# Altium PCB OPAMP_TESTERh.PcbDoc (part 2 of 2)
Units mil, origin at the board's own origin, x right, y up, seen from the top; angles counter-clockwise.
Board outline 10340.03 x 6170.03 mil, 2 copper layers (Top Layer, Bottom Layer); 210 components, 0 nets, 1610 pads, 0 vias.
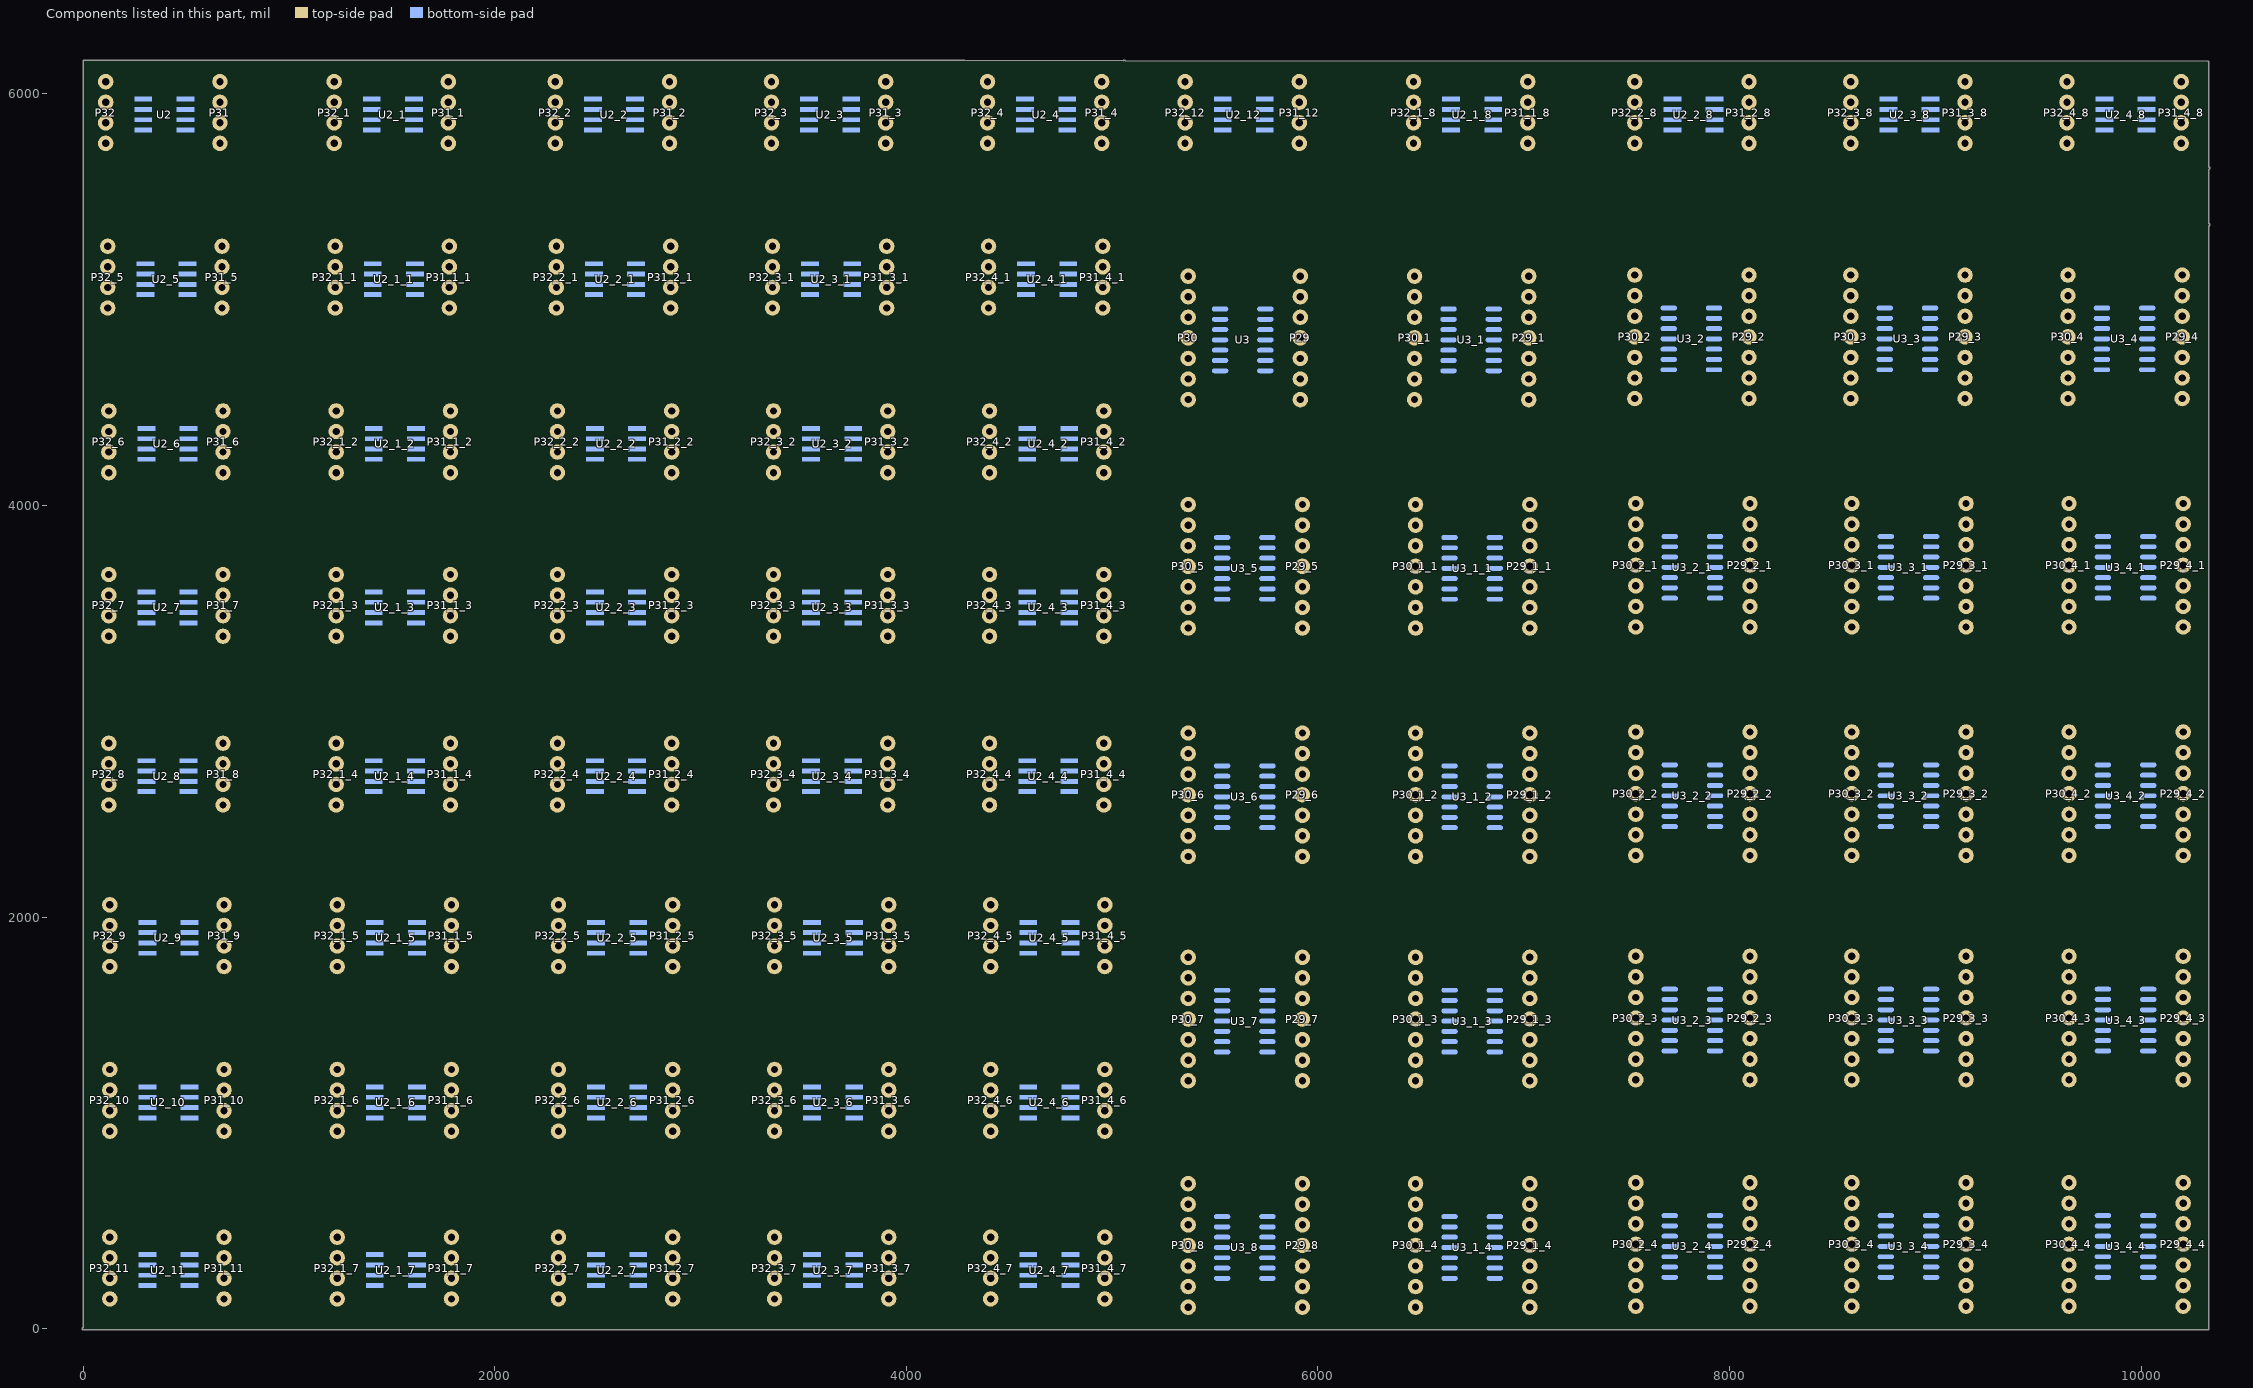
[diagram p2: the components of this part, seen from the top]

## Nets (pads, with @x,y where several pads share a name; then routed paths per layer and width w, separated by ;. In a path a pad name is that pad's centre, name@x,y a point inside that pad or via, vN(x,y) a via of type N, cw(c..) or ccw(c..) an arc to the next point about the centre after c; other vN are vias at no path point) (continued)
copper on no net: | length 143994.6
  Bottom Layer w30: 110,5760 175,5825 292.64,5825 ; 110,5860 122.18,5860 137.18,5875 292.64,5875 ; 110,5960 115.07,5960 150.07,5925 292.64,5925 ; 110,6060 118.61,6051.39 143.61,6051.39 220,5975 292.64,5975 ; 120,4960 185,5025 302.64,5025 ; 120,5060 132.18,5060 147.18,5075 302.64,5075 ; 120,5160 125.07,5160 160.07,5125 302.64,5125 ; 120,5260 128.61,5251.39 153.61,5251.39 230,5175 302.64,5175 ; 125,2545 190,2610 307.64,2610 ; 125,2645 137.18,2645 152.18,2660 307.64,2660 ; 125,2745 130.07,2745 165.07,2710 307.64,2710 ; 125,2845 133.61,2836.39 158.61,2836.39 235,2760 307.64,2760 ; 125,3365 190,3430 307.64,3430 ; 125,3465 137.18,3465 152.18,3480 307.64,3480 ; 125,3565 130.07,3565 165.07,3530 307.64,3530 ; 125,3665 133.61,3656.39 158.61,3656.39 235,3580 307.64,3580 ; 125,4160 190,4225 307.64,4225 ; 125,4260 137.18,4260 152.18,4275 307.64,4275 ; 125,4360 130.07,4360 165.07,4325 307.64,4325 ; 125,4460 133.61,4451.39 158.61,4451.39 235,4375 307.64,4375 ; 130,145 195,210 312.64,210 ; 130,245 142.18,245 157.18,260 312.64,260 ; 130,345 135.07,345 170.07,310 312.64,310 ; 130,445 138.61,436.39 163.61,436.39 240,360 312.64,360 ; 130,960 195,1025 312.64,1025 ; 130,1060 142.18,1060 157.18,1075 312.64,1075 ; 130,1160 135.07,1160 170.07,1125 312.64,1125 ; 130,1260 138.61,1251.39 163.61,1251.39 240,1175 312.64,1175 ; 130,1760 195,1825 312.64,1825 ; 130,1860 142.18,1860 157.18,1875 312.64,1875 ; 130,1960 135.07,1960 170.07,1925 312.64,1925 ; 130,2060 138.61,2051.39 163.61,2051.39 240,1975 312.64,1975 ; 497.36,5825 585,5825 641.39,5768.61 656.39,5768.61 665,5760 ; 497.36,5875 637.82,5875 652.82,5860 665,5860 ; 497.36,5925 617.82,5925 652.82,5960 665,5960 ; 497.36,5975 580,5975 665,6060 ; 507.36,5025 595,5025 651.39,4968.61 666.39,4968.61 675,4960 ; 507.36,5075 647.82,5075 662.82,5060 675,5060 ; 507.36,5125 627.82,5125 662.82,5160 675,5160 ; 507.36,5175 590,5175 675,5260 ; 512.36,2610 600,2610 656.39,2553.61 671.39,2553.61 680,2545 ; 512.36,2660 652.82,2660 667.82,2645 680,2645 ; 512.36,2710 632.82,2710 667.82,2745 680,2745 ; 512.36,2760 595,2760 680,2845 ; 512.36,3430 600,3430 656.39,3373.61 671.39,3373.61 680,3365 ; 512.36,3480 652.82,3480 667.82,3465 680,3465 ; 512.36,3530 632.82,3530 667.82,3565 680,3565 ; 512.36,3580 595,3580 680,3665 ; 512.36,4225 600,4225 656.39,4168.61 671.39,4168.61 680,4160 ; 512.36,4275 652.82,4275 667.82,4260 680,4260 ; 512.36,4325 632.82,4325 667.82,4360 680,4360 ; 512.36,4375 595,4375 680,4460 ; 517.36,210 605,210 661.39,153.61 676.39,153.61 685,145 ; 517.36,260 657.82,260 672.82,245 685,245 ; 517.36,310 637.82,310 672.82,345 685,345 ; 517.36,360 600,360 685,445 ; 517.36,1025 605,1025 661.39,968.61 676.39,968.61 685,960 ; 517.36,1075 657.82,1075 672.82,1060 685,1060 ; 517.36,1125 637.82,1125 672.82,1160 685,1160 ; 517.36,1175 600,1175 685,1260 ; 517.36,1825 605,1825 661.39,1768.61 676.39,1768.61 685,1760 ; 517.36,1875 657.82,1875 672.82,1860 685,1860 ; 517.36,1925 637.82,1925 672.82,1960 685,1960 ; 517.36,1975 600,1975 685,2060 ; 1220,5760 1285,5825 1402.64,5825 ; 1220,5860 1232.18,5860 1247.18,5875 1402.64,5875 ; 1220,5960 1225.07,5960 1260.07,5925 1402.64,5925 ; 1220,6060 1228.61,6051.39 1253.61,6051.39 1330,5975 1402.64,5975 ; 1225,4960 1290,5025 1407.64,5025 ; 1225,5060 1237.18,5060 1252.18,5075 1407.64,5075 ; 1225,5160 1230.07,5160 1265.07,5125 1407.64,5125 ; 1225,5260 1233.61,5251.39 1258.61,5251.39 1335,5175 1407.64,5175 ; 1230,2545 1295,2610 1412.64,2610 ; 1230,2645 1242.18,2645 1257.18,2660 1412.64,2660 ; 1230,2745 1235.07,2745 1270.07,2710 1412.64,2710 ; 1230,2845 1238.61,2836.39 1263.61,2836.39 1340,2760 1412.64,2760 ; 1230,3365 1295,3430 1412.64,3430 ; 1230,3465 1242.18,3465 1257.18,3480 1412.64,3480 ; 1230,3565 1235.07,3565 1270.07,3530 1412.64,3530 ; 1230,3665 1238.61,3656.39 1263.61,3656.39 1340,3580 1412.64,3580 ; 1230,4160 1295,4225 1412.64,4225 ; 1230,4260 1242.18,4260 1257.18,4275 1412.64,4275 ; 1230,4360 1235.07,4360 1270.07,4325 1412.64,4325 ; 1230,4460 1238.61,4451.39 1263.61,4451.39 1340,4375 1412.64,4375 ; 1235,145 1300,210 1417.64,210 ; 1235,245 1247.18,245 1262.18,260 1417.64,260 ; 1235,345 1240.07,345 1275.07,310 1417.64,310 ; 1235,445 1243.61,436.39 1268.61,436.39 1345,360 1417.64,360 ; 1235,960 1300,1025 1417.64,1025 ; 1235,1060 1247.18,1060 1262.18,1075 1417.64,1075 ; 1235,1160 1240.07,1160 1275.07,1125 1417.64,1125 ; 1235,1260 1243.61,1251.39 1268.61,1251.39 1345,1175 1417.64,1175 ; 1235,1760 1300,1825 1417.64,1825 ; 1235,1860 1247.18,1860 1262.18,1875 1417.64,1875 ; 1235,1960 1240.07,1960 1275.07,1925 1417.64,1925 ; 1235,2060 1243.61,2051.39 1268.61,2051.39 1345,1975 1417.64,1975 ; 1607.36,5825 1695,5825 1751.39,5768.61 1766.39,5768.61 1775,5760 ; 1607.36,5875 1747.82,5875 1762.82,5860 1775,5860 ; 1607.36,5925 1727.82,5925 1762.82,5960 1775,5960 ; 1607.36,5975 1690,5975 1775,6060 ; 1612.36,5025 1700,5025 1756.39,4968.61 1771.39,4968.61 1780,4960 ; 1612.36,5075 1752.82,5075 1767.82,5060 1780,5060 ; 1612.36,5125 1732.82,5125 1767.82,5160 1780,5160 ; 1612.36,5175 1695,5175 1780,5260 ; 1617.36,2610 1705,2610 1761.39,2553.61 1776.39,2553.61 1785,2545 ; 1617.36,2660 1757.82,2660 1772.82,2645 1785,2645 ; 1617.36,2710 1737.82,2710 1772.82,2745 1785,2745 ; 1617.36,2760 1700,2760 1785,2845 ; 1617.36,3430 1705,3430 1761.39,3373.61 1776.39,3373.61 1785,3365 ; 1617.36,3480 1757.82,3480 1772.82,3465 1785,3465 ; 1617.36,3530 1737.82,3530 1772.82,3565 1785,3565 ; 1617.36,3580 1700,3580 1785,3665 ; 1617.36,4225 1705,4225 1761.39,4168.61 1776.39,4168.61 1785,4160 ; 1617.36,4275 1757.82,4275 1772.82,4260 1785,4260 ; 1617.36,4325 1737.82,4325 1772.82,4360 1785,4360 ; 1617.36,4375 1700,4375 1785,4460 ; 1622.36,210 1710,210 1766.39,153.61 1781.39,153.61 1790,145 ; 1622.36,260 1762.82,260 1777.82,245 1790,245 ; 1622.36,310 1742.82,310 1777.82,345 1790,345 ; 1622.36,360 1705,360 1790,445 ; 1622.36,1025 1710,1025 1766.39,968.61 1781.39,968.61 1790,960 ; 1622.36,1075 1762.82,1075 1777.82,1060 1790,1060 ; 1622.36,1125 1742.82,1125 1777.82,1160 1790,1160 ; 1622.36,1175 1705,1175 1790,1260 ; 1622.36,1825 1710,1825 1766.39,1768.61 1781.39,1768.61 1790,1760 ; 1622.36,1875 1762.82,1875 1777.82,1860 1790,1860 ; 1622.36,1925 1742.82,1925 1777.82,1960 1790,1960 ; 1622.36,1975 1705,1975 1790,2060 ; 2295,5760 2360,5825 2477.64,5825 ; 2295,5860 2307.18,5860 2322.18,5875 2477.64,5875 ; 2295,5960 2300.07,5960 2335.07,5925 2477.64,5925 ; 2295,6060 2303.61,6051.39 2328.61,6051.39 2405,5975 2477.64,5975 ; 2300,4960 2365,5025 2482.64,5025 ; 2300,5060 2312.18,5060 2327.18,5075 2482.64,5075 ; 2300,5160 2305.07,5160 2340.07,5125 2482.64,5125 ; 2300,5260 2308.61,5251.39 2333.61,5251.39 2410,5175 2482.64,5175 ; 2305,2545 2370,2610 2487.64,2610 ; 2305,2645 2317.18,2645 2332.18,2660 2487.64,2660 ; 2305,2745 2310.07,2745 2345.07,2710 2487.64,2710 ; 2305,2845 2313.61,2836.39 2338.61,2836.39 2415,2760 2487.64,2760 ; 2305,3365 2370,3430 2487.64,3430 ; 2305,3465 2317.18,3465 2332.18,3480 2487.64,3480 ; 2305,3565 2310.07,3565 2345.07,3530 2487.64,3530 ; 2305,3665 2313.61,3656.39 2338.61,3656.39 2415,3580 2487.64,3580 ; 2305,4160 2370,4225 2487.64,4225 ; 2305,4260 2317.18,4260 2332.18,4275 2487.64,4275 ; 2305,4360 2310.07,4360 2345.07,4325 2487.64,4325 ; 2305,4460 2313.61,4451.39 2338.61,4451.39 2415,4375 2487.64,4375 ; 2310,145 2375,210 2492.64,210 ; 2310,245 2322.18,245 2337.18,260 2492.64,260 ; 2310,345 2315.07,345 2350.07,310 2492.64,310 ; 2310,445 2318.61,436.39 2343.61,436.39 2420,360 2492.64,360 ; 2310,960 2375,1025 2492.64,1025 ; 2310,1060 2322.18,1060 2337.18,1075 2492.64,1075 ; 2310,1160 2315.07,1160 2350.07,1125 2492.64,1125 ; 2310,1260 2318.61,1251.39 2343.61,1251.39 2420,1175 2492.64,1175 ; 2310,1760 2375,1825 2492.64,1825 ; 2310,1860 2322.18,1860 2337.18,1875 2492.64,1875 ; 2310,1960 2315.07,1960 2350.07,1925 2492.64,1925 ; 2310,2060 2318.61,2051.39 2343.61,2051.39 2420,1975 2492.64,1975 ; 2682.36,5825 2770,5825 2826.39,5768.61 2841.39,5768.61 2850,5760 ; 2682.36,5875 2822.82,5875 2837.82,5860 2850,5860 ; 2682.36,5925 2802.82,5925 2837.82,5960 2850,5960 ; 2682.36,5975 2765,5975 2850,6060 ; 2687.36,5025 2775,5025 2831.39,4968.61 2846.39,4968.61 2855,4960 ; 2687.36,5075 2827.82,5075 2842.82,5060 2855,5060 ; 2687.36,5125 2807.82,5125 2842.82,5160 2855,5160 ; 2687.36,5175 2770,5175 2855,5260 ; 2692.36,2610 2780,2610 2836.39,2553.61 2851.39,2553.61 2860,2545 ; 2692.36,2660 2832.82,2660 2847.82,2645 2860,2645 ; 2692.36,2710 2812.82,2710 2847.82,2745 2860,2745 ; 2692.36,2760 2775,2760 2860,2845 ; 2692.36,3430 2780,3430 2836.39,3373.61 2851.39,3373.61 2860,3365 ; 2692.36,3480 2832.82,3480 2847.82,3465 2860,3465 ; 2692.36,3530 2812.82,3530 2847.82,3565 2860,3565 ; 2692.36,3580 2775,3580 2860,3665 ; 2692.36,4225 2780,4225 2836.39,4168.61 2851.39,4168.61 2860,4160 ; 2692.36,4275 2832.82,4275 2847.82,4260 2860,4260 ; 2692.36,4325 2812.82,4325 2847.82,4360 2860,4360 ; 2692.36,4375 2775,4375 2860,4460 ; 2697.36,210 2785,210 2841.39,153.61 2856.39,153.61 2865,145 ; 2697.36,260 2837.82,260 2852.82,245 2865,245 ; 2697.36,310 2817.82,310 2852.82,345 2865,345 ; 2697.36,360 2780,360 2865,445 ; 2697.36,1025 2785,1025 2841.39,968.61 2856.39,968.61 2865,960 ; 2697.36,1075 2837.82,1075 2852.82,1060 2865,1060 ; 2697.36,1125 2817.82,1125 2852.82,1160 2865,1160 ; 2697.36,1175 2780,1175 2865,1260 ; 2697.36,1825 2785,1825 2841.39,1768.61 2856.39,1768.61 2865,1760 ; 2697.36,1875 2837.82,1875 2852.82,1860 2865,1860 ; 2697.36,1925 2817.82,1925 2852.82,1960 2865,1960 ; 2697.36,1975 2780,1975 2865,2060 ; 3345,5760 3410,5825 3527.64,5825 ; 3345,5860 3357.18,5860 3372.18,5875 3527.64,5875 ; 3345,5960 3350.07,5960 3385.07,5925 3527.64,5925 ; 3345,6060 3353.61,6051.39 3378.61,6051.39 3455,5975 3527.64,5975 ; 3350,4960 3415,5025 3532.64,5025 ; 3350,5060 3362.18,5060 3377.18,5075 3532.64,5075 ; 3350,5160 3355.07,5160 3390.07,5125 3532.64,5125 ; 3350,5260 3358.61,5251.39 3383.61,5251.39 3460,5175 3532.64,5175 ; 3355,2545 3420,2610 3537.64,2610 ; 3355,2645 3367.18,2645 3382.18,2660 3537.64,2660 ; 3355,2745 3360.07,2745 3395.07,2710 3537.64,2710 ; 3355,2845 3363.61,2836.39 3388.61,2836.39 3465,2760 3537.64,2760 ; 3355,3365 3420,3430 3537.64,3430 ; 3355,3465 3367.18,3465 3382.18,3480 3537.64,3480 ; 3355,3565 3360.07,3565 3395.07,3530 3537.64,3530 ; 3355,3665 3363.61,3656.39 3388.61,3656.39 3465,3580 3537.64,3580 ; 3355,4160 3420,4225 3537.64,4225 ; 3355,4260 3367.18,4260 3382.18,4275 3537.64,4275 ; 3355,4360 3360.07,4360 3395.07,4325 3537.64,4325 ; 3355,4460 3363.61,4451.39 3388.61,4451.39 3465,4375 3537.64,4375 ; 3360,145 3425,210 3542.64,210 ; 3360,245 3372.18,245 3387.18,260 3542.64,260 ; 3360,345 3365.07,345 3400.07,310 3542.64,310 ; 3360,445 3368.61,436.39 3393.61,436.39 3470,360 3542.64,360 ; 3360,960 3425,1025 3542.64,1025 ; 3360,1060 3372.18,1060 3387.18,1075 3542.64,1075 ; 3360,1160 3365.07,1160 3400.07,1125 3542.64,1125 ; 3360,1260 3368.61,1251.39 3393.61,1251.39 3470,1175 3542.64,1175 ; 3360,1760 3425,1825 3542.64,1825 ; 3360,1860 3372.18,1860 3387.18,1875 3542.64,1875 ; 3360,1960 3365.07,1960 3400.07,1925 3542.64,1925 ; 3360,2060 3368.61,2051.39 3393.61,2051.39 3470,1975 3542.64,1975 ; 3732.36,5825 3820,5825 3876.39,5768.61 3891.39,5768.61 3900,5760 ; 3732.36,5875 3872.82,5875 3887.82,5860 3900,5860 ; 3732.36,5925 3852.82,5925 3887.82,5960 3900,5960 ; 3732.36,5975 3815,5975 3900,6060 ; 3737.36,5025 3825,5025 3881.39,4968.61 3896.39,4968.61 3905,4960 ; 3737.36,5075 3877.82,5075 3892.82,5060 3905,5060 ; 3737.36,5125 3857.82,5125 3892.82,5160 3905,5160 ; 3737.36,5175 3820,5175 3905,5260 ; 3742.36,2610 3830,2610 3886.39,2553.61 3901.39,2553.61 3910,2545 ; 3742.36,2660 3882.82,2660 3897.82,2645 3910,2645 ; 3742.36,2710 3862.82,2710 3897.82,2745 3910,2745 ; 3742.36,2760 3825,2760 3910,2845 ; 3742.36,3430 3830,3430 3886.39,3373.61 3901.39,3373.61 3910,3365 ; 3742.36,3480 3882.82,3480 3897.82,3465 3910,3465 ; 3742.36,3530 3862.82,3530 3897.82,3565 3910,3565 ; 3742.36,3580 3825,3580 3910,3665 ; 3742.36,4225 3830,4225 3886.39,4168.61 3901.39,4168.61 3910,4160 ; 3742.36,4275 3882.82,4275 3897.82,4260 3910,4260 ; 3742.36,4325 3862.82,4325 3897.82,4360 3910,4360 ; 3742.36,4375 3825,4375 3910,4460 ; 3747.36,210 3835,210 3891.39,153.61 3906.39,153.61 3915,145 ; 3747.36,260 3887.82,260 3902.82,245 3915,245 ; 3747.36,310 3867.82,310 3902.82,345 3915,345 ; 3747.36,360 3830,360 3915,445 ; 3747.36,1025 3835,1025 3891.39,968.61 3906.39,968.61 3915,960 ; 3747.36,1075 3887.82,1075 3902.82,1060 3915,1060 ; 3747.36,1125 3867.82,1125 3902.82,1160 3915,1160 ; 3747.36,1175 3830,1175 3915,1260 ; 3747.36,1825 3835,1825 3891.39,1768.61 3906.39,1768.61 3915,1760 ; 3747.36,1875 3887.82,1875 3902.82,1860 3915,1860 ; 3747.36,1925 3867.82,1925 3902.82,1960 3915,1960 ; 3747.36,1975 3830,1975 3915,2060 ; 4395,5760 4460,5825 4577.64,5825 ; 4395,5860 4407.18,5860 4422.18,5875 4577.64,5875 ; 4395,5960 4400.07,5960 4435.07,5925 4577.64,5925 ; 4395,6060 4403.61,6051.39 4428.61,6051.39 4505,5975 4577.64,5975 ; 4400,4960 4465,5025 4582.64,5025 ; 4400,5060 4412.18,5060 4427.18,5075 4582.64,5075 ; 4400,5160 4405.07,5160 4440.07,5125 4582.64,5125 ; 4400,5260 4408.61,5251.39 4433.61,5251.39 4510,5175 4582.64,5175 ; 4405,2545 4470,2610 4587.64,2610 ; 4405,2645 4417.18,2645 4432.18,2660 4587.64,2660 ; 4405,2745 4410.07,2745 4445.07,2710 4587.64,2710 ; 4405,2845 4413.61,2836.39 4438.61,2836.39 4515,2760 4587.64,2760 ; 4405,3365 4470,3430 4587.64,3430 ; 4405,3465 4417.18,3465 4432.18,3480 4587.64,3480 ; 4405,3565 4410.07,3565 4445.07,3530 4587.64,3530 ; 4405,3665 4413.61,3656.39 4438.61,3656.39 4515,3580 4587.64,3580 ; 4405,4160 4470,4225 4587.64,4225 ; 4405,4260 4417.18,4260 4432.18,4275 4587.64,4275 ; 4405,4360 4410.07,4360 4445.07,4325 4587.64,4325 ; 4405,4460 4413.61,4451.39 4438.61,4451.39 4515,4375 4587.64,4375 ; 4410,145 4475,210 4592.64,210 ; 4410,245 4422.18,245 4437.18,260 4592.64,260 ; 4410,345 4415.07,345 4450.07,310 4592.64,310 ; 4410,445 4418.61,436.39 4443.61,436.39 4520,360 4592.64,360 ; 4410,960 4475,1025 4592.64,1025 ; 4410,1060 4422.18,1060 4437.18,1075 4592.64,1075 ; 4410,1160 4415.07,1160 4450.07,1125 4592.64,1125 ; 4410,1260 4418.61,1251.39 4443.61,1251.39 4520,1175 4592.64,1175 ; 4410,1760 4475,1825 4592.64,1825 ; 4410,1860 4422.18,1860 4437.18,1875 4592.64,1875 ; 4410,1960 4415.07,1960 4450.07,1925 4592.64,1925 ; 4410,2060 4418.61,2051.39 4443.61,2051.39 4520,1975 4592.64,1975 ; 4782.36,5825 4870,5825 4926.39,5768.61 4941.39,5768.61 4950,5760 ; 4782.36,5875 4922.82,5875 4937.82,5860 4950,5860 ; 4782.36,5925 4902.82,5925 4937.82,5960 4950,5960 ; 4782.36,5975 4865,5975 4950,6060 ; 4787.36,5025 4875,5025 4931.39,4968.61 4946.39,4968.61 4955,4960 ; 4787.36,5075 4927.82,5075 4942.82,5060 4955,5060 ; 4787.36,5125 4907.82,5125 4942.82,5160 4955,5160 ; 4787.36,5175 4870,5175 4955,5260 ; 4792.36,2610 4880,2610 4936.39,2553.61 4951.39,2553.61 4960,2545 ; 4792.36,2660 4932.82,2660 4947.82,2645 4960,2645 ; 4792.36,2710 4912.82,2710 4947.82,2745 4960,2745 ; 4792.36,2760 4875,2760 4960,2845 ; 4792.36,3430 4880,3430 4936.39,3373.61 4951.39,3373.61 4960,3365 ; 4792.36,3480 4932.82,3480 4947.82,3465 4960,3465 ; 4792.36,3530 4912.82,3530 4947.82,3565 4960,3565 ; 4792.36,3580 4875,3580 4960,3665 ; 4792.36,4225 4880,4225 4936.39,4168.61 4951.39,4168.61 4960,4160 ; 4792.36,4275 4932.82,4275 4947.82,4260 4960,4260 ; 4792.36,4325 4912.82,4325 4947.82,4360 4960,4360 ; 4792.36,4375 4875,4375 4960,4460 ; 4797.36,210 4885,210 4941.39,153.61 4956.39,153.61 4965,145 ; 4797.36,260 4937.82,260 4952.82,245 4965,245 ; 4797.36,310 4917.82,310 4952.82,345 4965,345 ; 4797.36,360 4880,360 4965,445 ; 4797.36,1025 4885,1025 4941.39,968.61 4956.39,968.61 4965,960 ; 4797.36,1075 4937.82,1075 4952.82,1060 4965,1060 ; 4797.36,1125 4917.82,1125 4952.82,1160 4965,1160 ; 4797.36,1175 4880,1175 4965,1260 ; 4797.36,1825 4885,1825 4941.39,1768.61 4956.39,1768.61 4965,1760 ; 4797.36,1875 4937.82,1875 4952.82,1860 4965,1860 ; 4797.36,1925 4917.82,1925 4952.82,1960 4965,1960 ; 4797.36,1975 4880,1975 4965,2060 ; 5355,5760 5420,5825 5537.64,5825 ; 5355,5860 5367.18,5860 5382.18,5875 5537.64,5875 ; 5355,5960 5360.07,5960 5395.07,5925 5537.64,5925 ; 5355,6060 5363.61,6051.39 5388.61,6051.39 5465,5975 5537.64,5975 ; 5360,4515 5363,4515 5503,4655 5525,4655 ; 5360,4615 5447,4702 5522,4702 5525,4705 ; 5360,4715 5372.18,4715 5412.18,4755 5525,4755 ; 5360,4815 5442.5,4815 5452.5,4805 5525,4805 ; 5360,4915 5362.67,4915 5422.67,4855 5525,4855 ; 5360,5015 5470.96,4904.04 5524.04,4904.04 ; 5360,5115 5445,5115 5525,5035 5525,4955 ; 5370,105 5373,105 5513,245 5535,245 ; 5370,205 5457,292 5532,292 5535,295 ; 5370,305 5382.18,305 5422.18,345 5535,345 ; 5370,405 5452.5,405 5462.5,395 5535,395 ; 5370,505 5372.67,505 5432.67,445 5535,445 ; 5370,605 5480.96,494.04 5534.04,494.04 ; 5370,705 5455,705 5535,625 5535,545 ; 5370,1205 5373,1205 5513,1345 5535,1345 ; 5370,1305 5457,1392 5532,1392 5535,1395 ; 5370,1405 5382.18,1405 5422.18,1445 5535,1445 ; 5370,1505 5452.5,1505 5462.5,1495 5535,1495 ; 5370,1605 5372.67,1605 5432.67,1545 5535,1545 ; 5370,1705 5480.96,1594.04 5534.04,1594.04 ; 5370,1805 5455,1805 5535,1725 5535,1645 ; 5370,2295 5373,2295 5513,2435 5535,2435 ; 5370,2395 5457,2482 5532,2482 5535,2485 ; 5370,2495 5382.18,2495 5422.18,2535 5535,2535 ; 5370,2595 5452.5,2595 5462.5,2585 5535,2585 ; 5370,2695 5372.67,2695 5432.67,2635 5535,2635 ; 5370,2795 5480.96,2684.04 5534.04,2684.04 ; 5370,2895 5455,2895 5535,2815 5535,2735 ; 5370,3405 5373,3405 5513,3545 5535,3545 ; 5370,3505 5457,3592 5532,3592 5535,3595 ; 5370,3605 5382.18,3605 5422.18,3645 5535,3645 ; 5370,3705 5452.5,3705 5462.5,3695 5535,3695 ; 5370,3805 5372.67,3805 5432.67,3745 5535,3745 ; 5370,3905 5480.96,3794.04 5534.04,3794.04 ; 5370,4005 5455,4005 5535,3925 5535,3845 ; 5742.36,5825 5830,5825 5886.39,5768.61 5901.39,5768.61 5910,5760 ; 5742.36,5875 5882.82,5875 5897.82,5860 5910,5860 ; 5742.36,5925 5862.82,5925 5897.82,5960 5910,5960 ; 5742.36,5975 5825,5975 5910,6060 ; 5745,4655 5775,4655 5915,4515 ; 5745,4703.65 5826.35,4703.65 5915,4615 ; 5745,4755 5862.82,4755 5902.82,4715 5915,4715 ; 5745,4805.74 5893.56,4805.74 5902.82,4815 5915,4815 ; 5745,4855 5852.33,4855 5912.33,4915 5915,4915 ; 5745,4955 5745,5030 5830,5115 5915,5115 ; 5745.1,4905.1 5805.1,4905.1 5915,5015 ; 5755,245 5785,245 5925,105 ; 5755,293.65 5836.35,293.65 5925,205 ; 5755,345 5872.82,345 5912.82,305 5925,305 ; 5755,395.74 5903.56,395.74 5912.82,405 5925,405 ; 5755,445 5862.33,445 5922.33,505 5925,505 ; 5755,545 5755,620 5840,705 5925,705 ; 5755,1345 5785,1345 5925,1205 ; 5755,1393.65 5836.35,1393.65 5925,1305 ; 5755,1445 5872.82,1445 5912.82,1405 5925,1405 ; 5755,1495.74 5903.56,1495.74 5912.82,1505 5925,1505 ; 5755,1545 5862.33,1545 5922.33,1605 5925,1605 ; 5755,1645 5755,1720 5840,1805 5925,1805 ; 5755,2435 5785,2435 5925,2295 ; 5755,2483.65 5836.35,2483.65 5925,2395 ; 5755,2535 5872.82,2535 5912.82,2495 5925,2495 ; 5755,2585.74 5903.56,2585.74 5912.82,2595 5925,2595 ; 5755,2635 5862.33,2635 5922.33,2695 5925,2695 ; 5755,2735 5755,2810 5840,2895 5925,2895 ; 5755,3545 5785,3545 5925,3405 ; 5755,3593.65 5836.35,3593.65 5925,3505 ; 5755,3645 5872.82,3645 5912.82,3605 5925,3605 ; 5755,3695.74 5903.56,3695.74 5912.82,3705 5925,3705 ; 5755,3745 5862.33,3745 5922.33,3805 5925,3805 ; 5755,3845 5755,3920 5840,4005 5925,4005 ; 5755.1,495.1 5815.1,495.1 5925,605 ; 5755.1,1595.1 5815.1,1595.1 5925,1705 ; 5755.1,2685.1 5815.1,2685.1 5925,2795 ; 5755.1,3795.1 5815.1,3795.1 5925,3905 ; 6465,5760 6530,5825 6647.64,5825 ; 6465,5860 6477.18,5860 6492.18,5875 6647.64,5875 ; 6465,5960 6470.07,5960 6505.07,5925 6647.64,5925 ; 6465,6060 6473.61,6051.39 6498.61,6051.39 6575,5975 6647.64,5975 ; 6470,4515 6473,4515 6613,4655 6635,4655 ; 6470,4615 6557,4702 6632,4702 6635,4705 ; 6470,4715 6482.18,4715 6522.18,4755 6635,4755 ; 6470,4815 6552.5,4815 6562.5,4805 6635,4805 ; 6470,4915 6472.67,4915 6532.67,4855 6635,4855 ; 6470,5015 6580.96,4904.04 6634.04,4904.04 ; 6470,5115 6555,5115 6635,5035 6635,4955 ; 6475,105 6478,105 6618,245 6640,245 ; 6475,205 6562,292 6637,292 6640,295 ; 6475,305 6487.18,305 6527.18,345 6640,345 ; 6475,405 6557.5,405 6567.5,395 6640,395 ; 6475,505 6477.67,505 6537.67,445 6640,445 ; 6475,605 6585.96,494.04 6639.04,494.04 ; 6475,705 6560,705 6640,625 6640,545 ; 6475,1205 6478,1205 6618,1345 6640,1345 ; 6475,1305 6562,1392 6637,1392 6640,1395 ; 6475,1405 6487.18,1405 6527.18,1445 6640,1445 ; 6475,1505 6557.5,1505 6567.5,1495 6640,1495 ; 6475,1605 6477.67,1605 6537.67,1545 6640,1545 ; 6475,1705 6585.96,1594.04 6639.04,1594.04 ; 6475,1805 6560,1805 6640,1725 6640,1645 ; 6475,2295 6478,2295 6618,2435 6640,2435 ; 6475,2395 6562,2482 6637,2482 6640,2485 ; 6475,2495 6487.18,2495 6527.18,2535 6640,2535 ; 6475,2595 6557.5,2595 6567.5,2585 6640,2585 ; 6475,2695 6477.67,2695 6537.67,2635 6640,2635 ; 6475,2795 6585.96,2684.04 6639.04,2684.04 ; 6475,2895 6560,2895 6640,2815 6640,2735 ; 6475,3405 6478,3405 6618,3545 6640,3545 ; 6475,3505 6562,3592 6637,3592 6640,3595 ; 6475,3605 6487.18,3605 6527.18,3645 6640,3645 ; 6475,3705 6557.5,3705 6567.5,3695 6640,3695 ; 6475,3805 6477.67,3805 6537.67,3745 6640,3745 ; 6475,3905 6585.96,3794.04 6639.04,3794.04 ; 6475,4005 6560,4005 6640,3925 6640,3845 ; 6852.36,5825 6940,5825 6996.39,5768.61 7011.39,5768.61 7020,5760 ; 6852.36,5875 6992.82,5875 7007.82,5860 7020,5860 ; 6852.36,5925 6972.82,5925 7007.82,5960 7020,5960 ; 6852.36,5975 6935,5975 7020,6060 ; 6855,4655 6885,4655 7025,4515 ; 6855,4703.65 6936.35,4703.65 7025,4615 ; 6855,4755 6972.82,4755 7012.82,4715 7025,4715 ; 6855,4805.74 7003.56,4805.74 7012.82,4815 7025,4815 ; 6855,4855 6962.33,4855 7022.33,4915 7025,4915 ; 6855,4955 6855,5030 6940,5115 7025,5115 ; 6855.1,4905.1 6915.1,4905.1 7025,5015 ; 6860,245 6890,245 7030,105 ; 6860,293.65 6941.35,293.65 7030,205 ; 6860,345 6977.82,345 7017.82,305 7030,305 ; 6860,395.74 7008.56,395.74 7017.82,405 7030,405 ; 6860,445 6967.33,445 7027.33,505 7030,505 ; 6860,545 6860,620 6945,705 7030,705 ; 6860,1345 6890,1345 7030,1205 ; 6860,1393.65 6941.35,1393.65 7030,1305 ; 6860,1445 6977.82,1445 7017.82,1405 7030,1405 ; 6860,1495.74 7008.56,1495.74 7017.82,1505 7030,1505 ; 6860,1545 6967.33,1545 7027.33,1605 7030,1605 ; 6860,1645 6860,1720 6945,1805 7030,1805 ; 6860,2435 6890,2435 7030,2295 ; 6860,2483.65 6941.35,2483.65 7030,2395 ; 6860,2535 6977.82,2535 7017.82,2495 7030,2495 ; 6860,2585.74 7008.56,2585.74 7017.82,2595 7030,2595 ; 6860,2635 6967.33,2635 7027.33,2695 7030,2695 ; 6860,2735 6860,2810 6945,2895 7030,2895 ; 6860,3545 6890,3545 7030,3405 ; 6860,3593.65 6941.35,3593.65 7030,3505 ; 6860,3645 6977.82,3645 7017.82,3605 7030,3605 ; 6860,3695.74 7008.56,3695.74 7017.82,3705 7030,3705 ; 6860,3745 6967.33,3745 7027.33,3805 7030,3805 ; 6860,3845 6860,3920 6945,4005 7030,4005 ; 6860.1,495.1 6920.1,495.1 7030,605 ; 6860.1,1595.1 6920.1,1595.1 7030,1705 ; 6860.1,2685.1 6920.1,2685.1 7030,2795 ; 6860.1,3795.1 6920.1,3795.1 7030,3905 ; 7540,4520 7543,4520 7683,4660 7705,4660 ; 7540,4620 7627,4707 7702,4707 7705,4710 ; 7540,4720 7552.18,4720 7592.18,4760 7705,4760 ; 7540,4820 7622.5,4820 7632.5,4810 7705,4810 ; 7540,4920 7542.67,4920 7602.67,4860 7705,4860 ; 7540,5020 7650.96,4909.04 7704.04,4909.04 ; 7540,5120 7625,5120 7705,5040 7705,4960 ; 7540,5760 7605,5825 7722.64,5825 ; 7540,5860 7552.18,5860 7567.18,5875 7722.64,5875 ; 7540,5960 7545.07,5960 7580.07,5925 7722.64,5925 ; 7540,6060 7548.61,6051.39 7573.61,6051.39 7650,5975 7722.64,5975 ; 7545,110 7548,110 7688,250 7710,250 ; 7545,210 7632,297 7707,297 7710,300 ; 7545,310 7557.18,310 7597.18,350 7710,350 ; 7545,410 7627.5,410 7637.5,400 7710,400 ; 7545,510 7547.67,510 7607.67,450 7710,450 ; 7545,610 7655.96,499.04 7709.04,499.04 ; 7545,710 7630,710 7710,630 7710,550 ; 7545,1210 7548,1210 7688,1350 7710,1350 ; 7545,1310 7632,1397 7707,1397 7710,1400 ; 7545,1410 7557.18,1410 7597.18,1450 7710,1450 ; 7545,1510 7627.5,1510 7637.5,1500 7710,1500 ; 7545,1610 7547.67,1610 7607.67,1550 7710,1550 ; 7545,1710 7655.96,1599.04 7709.04,1599.04 ; 7545,1810 7630,1810 7710,1730 7710,1650 ; 7545,2300 7548,2300 7688,2440 7710,2440 ; 7545,2400 7632,2487 7707,2487 7710,2490 ; 7545,2500 7557.18,2500 7597.18,2540 7710,2540 ; 7545,2600 7627.5,2600 7637.5,2590 7710,2590 ; 7545,2700 7547.67,2700 7607.67,2640 7710,2640 ; 7545,2800 7655.96,2689.04 7709.04,2689.04 ; 7545,2900 7630,2900 7710,2820 7710,2740 ; 7545,3410 7548,3410 7688,3550 7710,3550 ; 7545,3510 7632,3597 7707,3597 7710,3600 ; 7545,3610 7557.18,3610 7597.18,3650 7710,3650 ; 7545,3710 7627.5,3710 7637.5,3700 7710,3700 ; 7545,3810 7547.67,3810 7607.67,3750 7710,3750 ; 7545,3910 7655.96,3799.04 7709.04,3799.04 ; 7545,4010 7630,4010 7710,3930 7710,3850 ; 7925,4660 7955,4660 8095,4520 ; 7925,4708.65 8006.35,4708.65 8095,4620 ; 7925,4760 8042.82,4760 8082.82,4720 8095,4720 ; 7925,4810.74 8073.56,4810.74 8082.82,4820 8095,4820 ; 7925,4860 8032.33,4860 8092.33,4920 8095,4920 ; 7925,4960 7925,5035 8010,5120 8095,5120 ; 7925.1,4910.1 7985.1,4910.1 8095,5020 ; 7927.36,5825 8015,5825 8071.39,5768.61 8086.39,5768.61 8095,5760 ; 7927.36,5875 8067.82,5875 8082.82,5860 8095,5860 ; 7927.36,5925 8047.82,5925 8082.82,5960 8095,5960 ; 7927.36,5975 8010,5975 8095,6060 ; 7930,250 7960,250 8100,110 ; 7930,298.65 8011.35,298.65 8100,210 ; 7930,350 8047.82,350 8087.82,310 8100,310 ; 7930,400.74 8078.56,400.74 8087.82,410 8100,410 ; 7930,450 8037.33,450 8097.33,510 8100,510 ; 7930,550 7930,625 8015,710 8100,710 ; 7930,1350 7960,1350 8100,1210 ; 7930,1398.65 8011.35,1398.65 8100,1310 ; 7930,1450 8047.82,1450 8087.82,1410 8100,1410 ; 7930,1500.74 8078.56,1500.74 8087.82,1510 8100,1510 ; 7930,1550 8037.33,1550 8097.33,1610 8100,1610 ; 7930,1650 7930,1725 8015,1810 8100,1810 ; 7930,2440 7960,2440 8100,2300 ; 7930,2488.65 8011.35,2488.65 8100,2400 ; 7930,2540 8047.82,2540 8087.82,2500 8100,2500 ; 7930,2590.74 8078.56,2590.74 8087.82,2600 8100,2600 ; 7930,2640 8037.33,2640 8097.33,2700 8100,2700 ; 7930,2740 7930,2815 8015,2900 8100,2900 ; 7930,3550 7960,3550 8100,3410 ; 7930,3598.65 8011.35,3598.65 8100,3510 ; 7930,3650 8047.82,3650 8087.82,3610 8100,3610 ; 7930,3700.74 8078.56,3700.74 8087.82,3710 8100,3710 ; 7930,3750 8037.33,3750 8097.33,3810 8100,3810 ; 7930,3850 7930,3925 8015,4010 8100,4010 ; 7930.1,500.1 7990.1,500.1 8100,610 ; 7930.1,1600.1 7990.1,1600.1 8100,1710 ; 7930.1,2690.1 7990.1,2690.1 8100,2800 ; 7930.1,3800.1 7990.1,3800.1 8100,3910 ; 8590,4520 8593,4520 8733,4660 8755,4660 ; 8590,4620 8677,4707 8752,4707 8755,4710 ; 8590,4720 8602.18,4720 8642.18,4760 8755,4760 ; 8590,4820 8672.5,4820 8682.5,4810 8755,4810 ; 8590,4920 8592.67,4920 8652.67,4860 8755,4860 ; 8590,5020 8700.96,4909.04 8754.04,4909.04 ; 8590,5120 8675,5120 8755,5040 8755,4960 ; 8590,5760 8655,5825 8772.64,5825 ; 8590,5860 8602.18,5860 8617.18,5875 8772.64,5875 ; 8590,5960 8595.07,5960 8630.07,5925 8772.64,5925 ; 8590,6060 8598.61,6051.39 8623.61,6051.39 8700,5975 8772.64,5975 ; 8595,110 8598,110 8738,250 8760,250 ; 8595,210 8682,297 8757,297 8760,300 ; 8595,310 8607.18,310 8647.18,350 8760,350 ; 8595,410 8677.5,410 8687.5,400 8760,400 ; 8595,510 8597.67,510 8657.67,450 8760,450 ; 8595,610 8705.96,499.04 8759.04,499.04 ; 8595,710 8680,710 8760,630 8760,550 ; 8595,1210 8598,1210 8738,1350 8760,1350 ; 8595,1310 8682,1397 8757,1397 8760,1400 ; 8595,1410 8607.18,1410 8647.18,1450 8760,1450 ; 8595,1510 8677.5,1510 8687.5,1500 8760,1500 ; 8595,1610 8597.67,1610 8657.67,1550 8760,1550 ; 8595,1710 8705.96,1599.04 8759.04,1599.04 ; 8595,1810 8680,1810 8760,1730 8760,1650 ; 8595,2300 8598,2300 8738,2440 8760,2440 ; 8595,2400 8682,2487 8757,2487 8760,2490 ; 8595,2500 8607.18,2500 8647.18,2540 8760,2540 ; 8595,2600 8677.5,2600 8687.5,2590 8760,2590 ; 8595,2700 8597.67,2700 8657.67,2640 8760,2640 ; 8595,2800 8705.96,2689.04 8759.04,2689.04 ; 8595,2900 8680,2900 8760,2820 8760,2740 ; 8595,3410 8598,3410 8738,3550 8760,3550 ; 8595,3510 8682,3597 8757,3597 8760,3600 ; 8595,3610 8607.18,3610 8647.18,3650 8760,3650 ; 8595,3710 8677.5,3710 8687.5,3700 8760,3700 ; 8595,3810 8597.67,3810 8657.67,3750 8760,3750 ; 8595,3910 8705.96,3799.04 8759.04,3799.04 ; 8595,4010 8680,4010 8760,3930 8760,3850 ; 8975,4660 9005,4660 9145,4520 ; 8975,4708.65 9056.35,4708.65 9145,4620 ; 8975,4760 9092.82,4760 9132.82,4720 9145,4720 ; 8975,4810.74 9123.56,4810.74 9132.82,4820 9145,4820 ; 8975,4860 9082.33,4860 9142.33,4920 9145,4920 ; 8975,4960 8975,5035 9060,5120 9145,5120 ; 8975.1,4910.1 9035.1,4910.1 9145,5020 ; 8977.36,5825 9065,5825 9121.39,5768.61 9136.39,5768.61 9145,5760 ; 8977.36,5875 9117.82,5875 9132.82,5860 9145,5860 ; 8977.36,5925 9097.82,5925 9132.82,5960 9145,5960 ; 8977.36,5975 9060,5975 9145,6060 ; 8980,250 9010,250 9150,110 ; 8980,298.65 9061.35,298.65 9150,210 ; 8980,350 9097.82,350 9137.82,310 9150,310 ; 8980,400.74 9128.56,400.74 9137.82,410 9150,410 ; 8980,450 9087.33,450 9147.33,510 9150,510 ; 8980,550 8980,625 9065,710 9150,710 ; 8980,1350 9010,1350 9150,1210 ; 8980,1398.65 9061.35,1398.65 9150,1310 ; 8980,1450 9097.82,1450 9137.82,1410 9150,1410 ; 8980,1500.74 9128.56,1500.74 9137.82,1510 9150,1510 ; 8980,1550 9087.33,1550 9147.33,1610 9150,1610 ; 8980,1650 8980,1725 9065,1810 9150,1810 ; 8980,2440 9010,2440 9150,2300 ; 8980,2488.65 9061.35,2488.65 9150,2400 ; 8980,2540 9097.82,2540 9137.82,2500 9150,2500 ; 8980,2590.74 9128.56,2590.74 9137.82,2600 9150,2600 ; 8980,2640 9087.33,2640 9147.33,2700 9150,2700 ; 8980,2740 8980,2815 9065,2900 9150,2900 ; 8980,3550 9010,3550 9150,3410 ; 8980,3598.65 9061.35,3598.65 9150,3510 ; 8980,3650 9097.82,3650 9137.82,3610 9150,3610 ; 8980,3700.74 9128.56,3700.74 9137.82,3710 9150,3710 ; 8980,3750 9087.33,3750 9147.33,3810 9150,3810 ; 8980,3850 8980,3925 9065,4010 9150,4010 ; 8980.1,500.1 9040.1,500.1 9150,610 ; 8980.1,1600.1 9040.1,1600.1 9150,1710 ; 8980.1,2690.1 9040.1,2690.1 9150,2800 ; 8980.1,3800.1 9040.1,3800.1 9150,3910 ; 9640,5760 9705,5825 9822.64,5825 ; 9640,5860 9652.18,5860 9667.18,5875 9822.64,5875 ; 9640,5960 9645.07,5960 9680.07,5925 9822.64,5925 ; 9640,6060 9648.61,6051.39 9673.61,6051.39 9750,5975 9822.64,5975 ; 9645,4520 9648,4520 9788,4660 9810,4660 ; 9645,4620 9732,4707 9807,4707 9810,4710 ; 9645,4720 9657.18,4720 9697.18,4760 9810,4760 ; 9645,4820 9727.5,4820 9737.5,4810 9810,4810 ; 9645,4920 9647.67,4920 9707.67,4860 9810,4860 ; 9645,5020 9755.96,4909.04 9809.04,4909.04 ; 9645,5120 9730,5120 9810,5040 9810,4960 ; 9650,110 9653,110 9793,250 9815,250 ; 9650,210 9737,297 9812,297 9815,300 ; 9650,310 9662.18,310 9702.18,350 9815,350 ; 9650,410 9732.5,410 9742.5,400 9815,400 ; 9650,510 9652.67,510 9712.67,450 9815,450 ; 9650,610 9760.96,499.04 9814.04,499.04 ; 9650,710 9735,710 9815,630 9815,550 ; 9650,1210 9653,1210 9793,1350 9815,1350 ; 9650,1310 9737,1397 9812,1397 9815,1400 ; 9650,1410 9662.18,1410 9702.18,1450 9815,1450 ; 9650,1510 9732.5,1510 9742.5,1500 9815,1500 ; 9650,1610 9652.67,1610 9712.67,1550 9815,1550 ; 9650,1710 9760.96,1599.04 9814.04,1599.04 ; 9650,1810 9735,1810 9815,1730 9815,1650 ; 9650,2300 9653,2300 9793,2440 9815,2440 ; 9650,2400 9737,2487 9812,2487 9815,2490 ; 9650,2500 9662.18,2500 9702.18,2540 9815,2540 ; 9650,2600 9732.5,2600 9742.5,2590 9815,2590 ; 9650,2700 9652.67,2700 9712.67,2640 9815,2640 ; 9650,2800 9760.96,2689.04 9814.04,2689.04 ; 9650,2900 9735,2900 9815,2820 9815,2740 ; 9650,3410 9653,3410 9793,3550 9815,3550 ; 9650,3510 9737,3597 9812,3597 9815,3600 ; 9650,3610 9662.18,3610 9702.18,3650 9815,3650 ; 9650,3710 9732.5,3710 9742.5,3700 9815,3700 ; 9650,3810 9652.67,3810 9712.67,3750 9815,3750 ; 9650,3910 9760.96,3799.04 9814.04,3799.04 ; 9650,4010 9735,4010 9815,3930 9815,3850 ; 10027.36,5825 10115,5825 10171.39,5768.61 10186.39,5768.61 10195,5760 ; 10027.36,5875 10167.82,5875 10182.82,5860 10195,5860 ; 10027.36,5925 10147.82,5925 10182.82,5960 10195,5960 ; 10027.36,5975 10110,5975 10195,6060 ; 10030,4660 10060,4660 10200,4520 ; 10030,4708.65 10111.35,4708.65 10200,4620 ; 10030,4760 10147.82,4760 10187.82,4720 10200,4720 ; 10030,4810.74 10178.56,4810.74 10187.82,4820 10200,4820 ; 10030,4860 10137.33,4860 10197.33,4920 10200,4920 ; 10030,4960 10030,5035 10115,5120 10200,5120 ; 10030.1,4910.1 10090.1,4910.1 10200,5020 ; 10035,250 10065,250 10205,110 ; 10035,298.65 10116.35,298.65 10205,210 ; 10035,350 10152.82,350 10192.82,310 10205,310 ; 10035,400.74 10183.56,400.74 10192.82,410 10205,410 ; 10035,450 10142.33,450 10202.33,510 10205,510 ; 10035,550 10035,625 10120,710 10205,710 ; 10035,1350 10065,1350 10205,1210 ; 10035,1398.65 10116.35,1398.65 10205,1310 ; 10035,1450 10152.82,1450 10192.82,1410 10205,1410 ; 10035,1500.74 10183.56,1500.74 10192.82,1510 10205,1510 ; 10035,1550 10142.33,1550 10202.33,1610 10205,1610 ; 10035,1650 10035,1725 10120,1810 10205,1810 ; 10035,2440 10065,2440 10205,2300 ; 10035,2488.65 10116.35,2488.65 10205,2400 ; 10035,2540 10152.82,2540 10192.82,2500 10205,2500 ; 10035,2590.74 10183.56,2590.74 10192.82,2600 10205,2600 ; 10035,2640 10142.33,2640 10202.33,2700 10205,2700 ; 10035,2740 10035,2815 10120,2900 10205,2900 ; 10035,3550 10065,3550 10205,3410 ; 10035,3598.65 10116.35,3598.65 10205,3510 ; 10035,3650 10152.82,3650 10192.82,3610 10205,3610 ; 10035,3700.74 10183.56,3700.74 10192.82,3710 10205,3710 ; 10035,3750 10142.33,3750 10202.33,3810 10205,3810 ; 10035,3850 10035,3925 10120,4010 10205,4010 ; 10035.1,500.1 10095.1,500.1 10205,610 ; 10035.1,1600.1 10095.1,1600.1 10205,1710 ; 10035.1,2690.1 10095.1,2690.1 10205,2800 ; 10035.1,3800.1 10095.1,3800.1 10205,3910

## Keep-outs
Keep-Out Layer:
  lines w10: 0,0 10325,0 10325,6154.98 5,6160 5,5 ; 5,565 5060,565 ; 5,840 5060,840 ; 5,1365 5060,1365 ; 5,1640 5060,1640 ; 5,2165 5060,2165 ; 5,2440 5060,2440 ; 5,2965 5060,2965 ; 5,3240 5060,3240 ; 5,3765 5060,3765 ; 5,4040 5060,4040 ; 5,4565 5060,4565 ; 5,4840 5060,4840 ; 5,5365 10330,5365 ; 5,5640 10330,5640 ; 800,5 800,6160 ; 1100,5 1100,6160 ; 1900,5 1900,6160 ; 2150,5 2150,6160 ; 2980,5 2980,6160 ; 3235,5 3235,6160 ; 4020,5 4020,6160 ; 4280,5 4280,6160 ; 5060,5 5060,6160 ; 5270,0 5270,6155 ; 5270,825 10325,825 ; 5270,1085 10325,1085 ; 5270,1915 10325,1915 ; 5270,2175 10325,2175 ; 5270,3005 10325,3005 ; 5270,3265 10325,3265 ; 5270,4155 10325,4155 ; 5270,4415 10325,4415 ; 6070,0 6070,6155 ; 6370,0 6370,6155 ; 7170,0 7170,6155 ; 7420,0 7420,6155 ; 8250,0 8250,6155 ; 8505,0 8505,6155 ; 9290,0 9290,6155 ; 9550,0 9550,6155